# EAGLE board colorTemp (EAGLE 9.6.1)
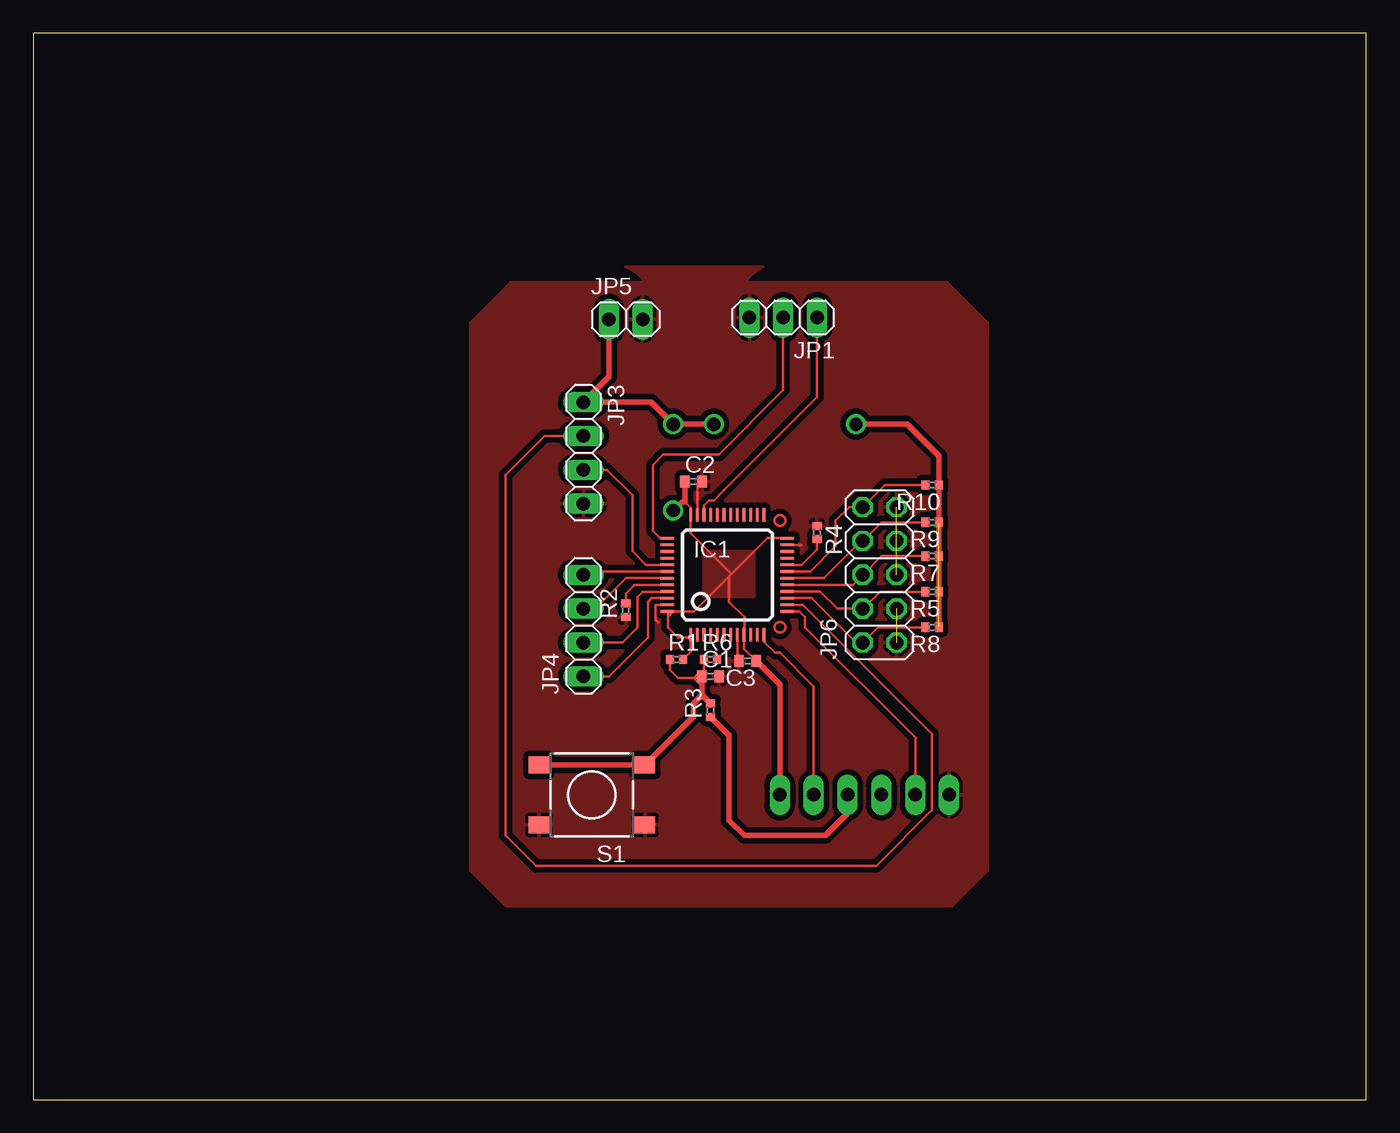
[diagram p0: board, top side]
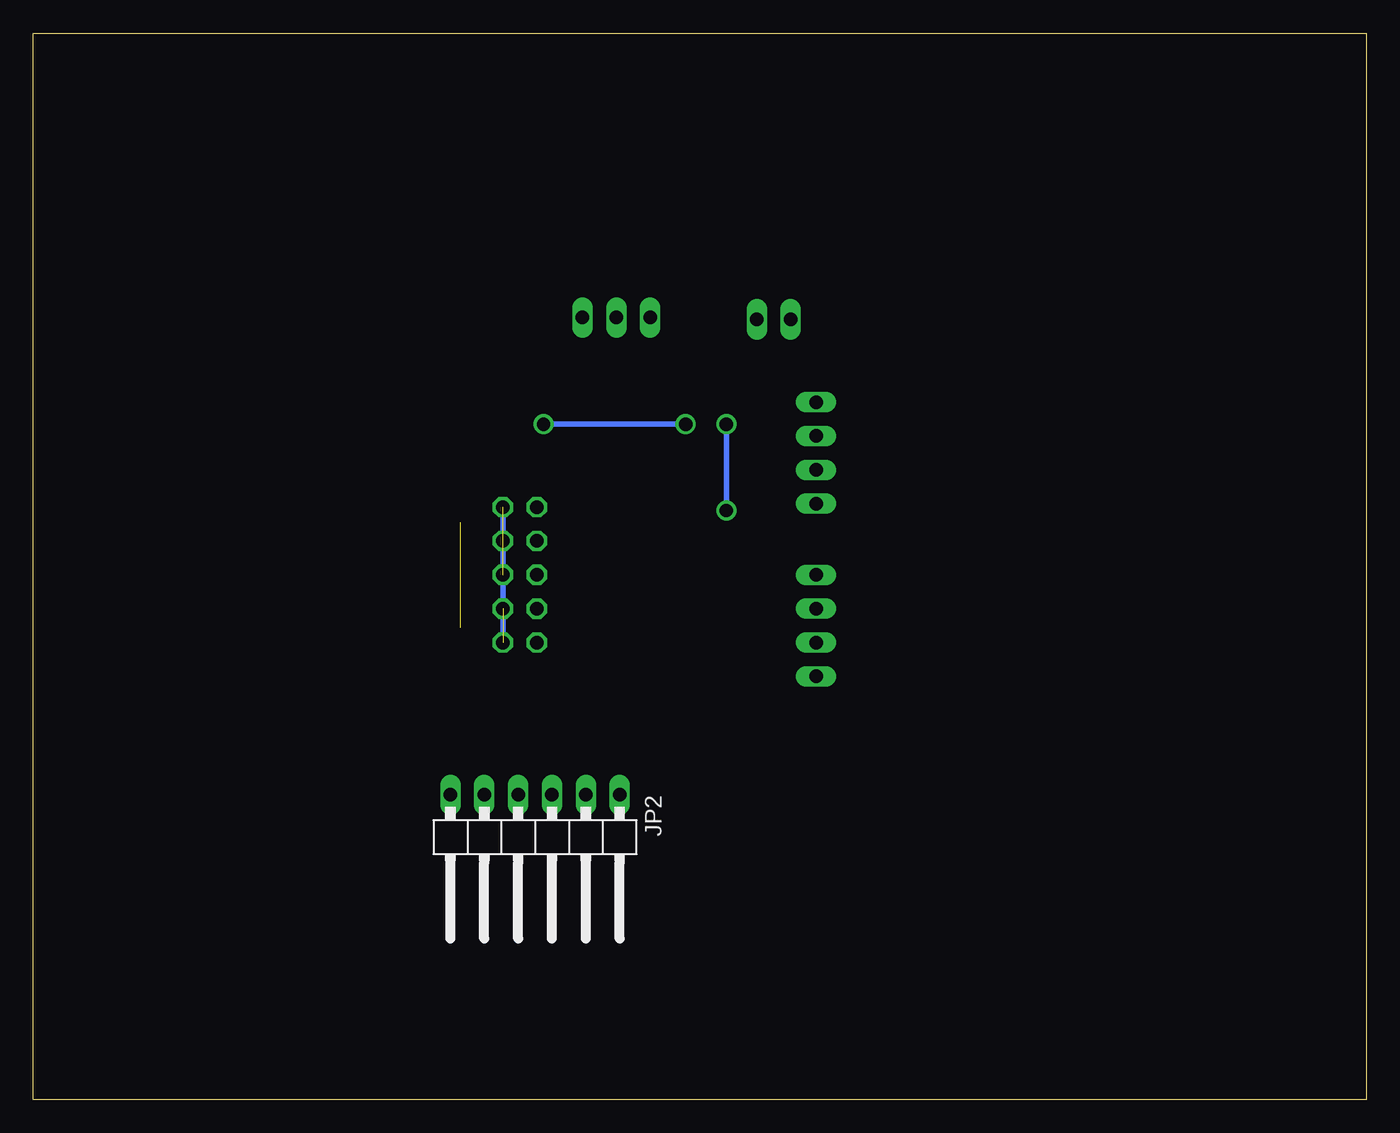
[diagram p1: board, bottom side, seen from below]

Size 100 x 80 mm. Coordinates in mm from the lower left corner, seen from the top.
Outline: 0,0 100,0 100,80 0,80 0,0
Copper layers (1*16): Top 0.035mm / dielectric 1.5mm / Bottom 0.035mm
Design rules "default": minimum track width 6mil, minimum drill 0.35mm, track to track 6mil, track to pad 6mil, pad to pad 6mil, via to via 6mil, smd to smd 6mil, copper to edge 40mil, drill to drill 6mil, minimum pad ring 10mil, minimum via ring 8mil, stop-mask expansion 4mil, vias tented up to drill 0mil, thermal gap 10mil

## Footprints (pad centres in the part's own frame; a part is rotated, then mirrored left to right if it is on the bottom)
C0402 = smd 0.7 x 0.9: 1 -0.65,0; 2 0.65,0
TQFP48 = smd 0.2 x 1: 1 -2.75,-4.5; 2 -2.25,-4.5; 3 -1.75,-4.5; 4 -1.25,-4.5; 5 -0.75,-4.5; 6 -0.25,-4.5; 7 0.25,-4.5; 8 0.75,-4.5; 9 1.25,-4.5; 10 1.75,-4.5; 11 2.25,-4.5; 12 2.75,-4.5; 25 2.75,4.5; 26 2.25,4.5; 27 1.75,4.5; 28 1.25,4.5; 29 0.75,4.5; 30 0.25,4.5; 31 -0.25,4.5; 32 -0.75,4.5; 33 -1.25,4.5; 34 -1.75,4.5; 35 -2.25,4.5; 36 -2.75,4.5 | smd 1 x 0.2: 13 4.5,-2.75; 14 4.5,-2.25; 15 4.5,-1.75; 16 4.5,-1.25; 17 4.5,-0.75; 18 4.5,-0.25; 19 4.5,0.25; 20 4.5,0.75; 21 4.5,1.25; 22 4.5,1.75; 23 4.5,2.25; 24 4.5,2.75; 37 -4.5,2.75; 38 -4.5,2.25; 39 -4.5,1.75; 40 -4.5,1.25; 41 -4.5,0.75; 42 -4.5,0.25; 43 -4.5,-0.25; 44 -4.5,-0.75; 45 -4.5,-1.25; 46 -4.5,-1.75; 47 -4.5,-2.25; 48 -4.5,-2.75
1X03 = drill 1.016 long: 1 -2.54,0; 2 0,0; 3 2.54,0
1X06/90 = drill 1.016 long: 1 -6.35,-3.81; 2 -3.81,-3.81; 3 -1.27,-3.81; 4 1.27,-3.81; 5 3.81,-3.81; 6 6.35,-3.81
1X04 = drill 1.016 long: 1 -3.81,0; 2 -1.27,0; 3 1.27,0; 4 3.81,0
1X02 = drill 1.016 long: 1 -1.27,0; 2 1.27,0
2X05 = drill 1.016 octagon: 1 -5.08,-1.27; 2 -5.08,1.27; 3 -2.54,-1.27; 4 -2.54,1.27; 5 0,-1.27; 6 0,1.27; 7 2.54,-1.27; 8 2.54,1.27; 9 5.08,-1.27; 10 5.08,1.27
R0402 = smd 0.6 x 0.7: 1 -0.5,0; 2 0.5,0
DTSM-6 = smd 1.55 x 1.3: 1 -3.975,2.25; 2 3.975,2.25; 3 -3.975,-2.25; 4 3.975,-2.25

## Placement (x,y rotation side)
C1  1nF  [C0402]  50.8,31.75 0 top
C2  100n  [C0402]  49.53,46.35 0 top
C3  100n  [C0402]  53.59,32.89 180 top
IC1  STM32F10XCXT6  [TQFP48]  52.07,39.37 0 top
JP1  [1X03]  56.26,58.67 180 top
JP2  [1X06/90]  62.36,19.05 180 bottom
JP3  [1X04]  41.27,48.51 270 top
JP4  [1X04]  41.27,35.56 90 top
JP5  [1X02]  44.45,58.55 0 top
JP6  [2X05]  63.5,39.37 90 top
R1  4.7k  [R0402]  48.26,33.02 0 top
R2  1k  [R0402]  44.45,36.7 90 top
R3  0Ohm  [R0402]  50.8,29.21 90 top
R4  1k  [R0402]  58.8,42.55 270 top
R5  [R0402]  67.44,38.1 180 top
R6  10k  [R0402]  50.8,33.02 0 top
R7  [R0402]  67.44,40.77 180 top
R8  [R0402]  67.44,35.43 180 top
R9  [R0402]  67.44,43.31 180 top
R10  [R0402]  67.44,46.1 180 top
S1  DTSM-6  [DTSM-6]  41.91,22.86 180 top

## Library data of the parts
C1-C3 = rcl; SPICEPREFIX: C
IC1 = stm32
JP1-JP6 = pinhead
R1-R10 = rcl; SPICEPREFIX: R
S1 = switch-tact

## Nets
3V3: C2.1 C3.1 IC1.1 IC1.9 IC1.24 IC1.36 IC1.48 JP2.1 JP3.1 JP5.1 R1.2 R5.1 R7.1 R8.1 R9.1 R10.1
ADC1: IC1.15 JP6.2 R8.2
ADC2: IC1.16 JP6.4 R5.2
ADC3: IC1.17 JP6.6 R7.2
ADC4: IC1.18 JP6.8 R9.2
ADC5: IC1.19 JP6.10 R10.2
GND: C1.2 C2.2 C3.2 IC1.8 IC1.23 IC1.35 IC1.47 JP1.3 JP2.6 JP3.4 JP5.2 JP6.1 JP6.3 JP6.5 JP6.7 JP6.9 R2.1 R4.1 S1.1 S1.2
N$2: IC1.44 R2.2
N$9: IC1.20 R4.2
N$18: IC1.7 R6.2
N$20: C1.1 R1.1 R3.2 R6.1 S1.3 S1.4
OE: IC1.41 JP3.3
OUT: IC1.14 JP3.2
RESET: JP2.3 R3.1
RX: IC1.13 JP2.5
S0: IC1.42 JP4.4
S1: IC1.43 JP4.3
S2: IC1.45 JP4.2
S3: IC1.46 JP4.1
SWCLK: IC1.37 JP1.2
SWDIO: IC1.34 JP1.1
TX: IC1.12 JP2.2

## Tracks (layer width: path | path; a pad name or v marks a point on that pad's centre or on a via)
3V3  (via drill 1)  (3 unrouted)
  Top 0.203: 49.32,34.67 IC1.1 49.32,34.84 49.15,34.67 | 49.32,34.67 49.32,34.5 | 49.32,34.5 49.32,33.58 R1.2 | C3.1 53.32,33.82 IC1.9 53.34,34.89 53.34,36.2 52.2,37.34 52.2,39.24 | 48.88,44.85 49.32,44.41 IC1.36 49.32,42.5 52.39,39.43 | 47.62,36.2 47.62,35.43 48.39,34.67 49.15,34.67 | 49.15,34.67 49.32,34.67 | 49.15,34.67 49.32,34.5 | IC1.24 55.07,42.12 52.39,39.43 | 52.39,39.43 52.2,39.24 | IC1.48 48.01,36.62 | 48.01,36.62 49.57,36.62 52.2,39.24 | 47.62,36.2 47.82,36.39 | 47.82,36.39 48.01,36.58 48.01,36.62 | IC1.48 47.8,36.39 47.82,36.39 | IC1.48 47.62,36.56 47.62,36.2
  Top 0.406: C3.1 56.01,31.13 JP2.1 | JP5.1 43.18,54.23 JP3.1 46.35,52.32 v48.01,50.67 v51.05,50.67 | v48.01,44.2 48.66,44.85 48.88,44.85 C2.1 | v61.72,50.67 65.53,50.67 67.94,48.27 R10.1 R8.1
  Bottom 0.406: v48.01,44.2 v48.01,50.67 | v51.05,50.67 v61.72,50.67
  pour Top: 50.29,41.15 50.29,37.72 54.1,37.72 54.1,41.15
ADC1
  Top 0.203: IC1.15 58.39,37.62 61.72,34.29 JP6.2 63.37,35.43 R8.2
ADC2
  Top 0.203: IC1.16 59.03,38.12 60.33,36.83 JP6.4 63.5,38.1 R5.2
ADC3
  Top 0.203: IC1.17 61.48,38.62 JP6.6 63.63,40.77 R7.2
ADC4
  Top 0.203: IC1.18 59.31,39.12 62.1,41.91 JP6.8 63.63,43.31 R9.2
ADC5
  Top 0.203: IC1.19 58.29,39.62 60.2,41.53 60.2,43.43 61.21,44.45 JP6.10 63.88,46.1 R10.2
GND  (3 unrouted)
  Top 0.203: IC1.35 49.82,45.99 C2.2 | IC1.8 52.82,33.02 C3.2 | IC1.47 46.68,37.12 46.68,35.99 46.86,35.81 | IC1.23 57.58,41.62 57.6,41.6
  Bottom 0.406: JP6.9 JP6.1
  pour Top (isolate 2.54): 30.86,62.48 72.01,62.48 72.01,14.48 30.86,14.48
  pour Top (isolate 0.406): 35.81,61.34 68.58,61.34 71.63,58.29 71.63,17.14 68.96,14.48 35.43,14.48 32.77,17.14 32.77,58.29
N$2
  Top 0.203: IC1.44 45.1,38.62 44.45,37.97 R2.2
N$9
  Top 0.203: IC1.20 57.65,40.12 58.8,41.27 R4.2
N$18
  Top 0.203: IC1.7 52.32,34.03 R6.2
N$20
  Top 0.203: R6.1 50.3,32 | 50.3,32 50.3,31.9 C1.1 | 50.15,31.24 50.15,31.62 | 50.15,31.62 C1.1 | 49.91,30.1 50.29,30.1 50.35,30.16 | R1.1 47.76,32.25 48.39,31.62 49.53,31.62 | 49.53,31.62 50.02,31.62 | 50.02,31.62 50.15,31.62 | C1.1 50.02,31.62 | 49.53,31.62 49.91,32 50.3,32 | 49.53,31.62 50.15,31 50.15,30.86
  Top 0.406: S1.4 S1.3 49.53,28.75 49.53,29.72 49.91,30.1 50.15,30.34 50.15,30.86 50.15,31.24 | R3.2 50.35,30.16 50.15,30.36
OE
  Top 0.203: JP3.3 43.05,47.24 44.96,45.34 44.96,41.15 45.99,40.12 IC1.41
OUT
  Top 0.203: IC1.14 57.75,37.12 67.44,27.43 67.44,21.72 63.25,17.53 37.72,17.53 35.43,19.81 35.43,46.86 38.35,49.78 JP3.2
RESET
  Top 0.406: R3.1 52.2,27.31 52.2,20.95 53.34,19.81 59.44,19.81 61.09,21.46 JP2.3
RX
  Top 0.203: IC1.13 57.49,36.62 57.91,36.2 57.91,35.43 66.17,27.18 JP2.5
S0
  Top 0.203: IC1.42 41.52,39.62 JP4.4
S1
  Top 0.203: IC1.43 44.45,39.12 42.16,36.83 JP4.3
S2
  Top 0.203: IC1.45 47.55,38.1 45.72,38.1 45.34,37.72 45.34,35.43 44.2,34.29 JP4.2
S3
  Top 0.203: IC1.46 46.38,37.62 46.1,37.34 46.1,34.67 43.18,31.75 JP4.1
SWCLK
  Top 0.203: JP1.2 56.26,53.21 51.44,48.39 47.24,48.39 46.48,47.62 46.48,42.67 47.03,42.12 IC1.37
SWDIO
  Top 0.203: JP1.1 58.8,52.7 51.82,45.72 51.05,44.96 50.7,44.96 50.32,44.57 IC1.34
TX
  Top 0.203: JP2.2 58.55,30.99 56.01,33.53 55.63,33.53 54.86,34.29 54.86,34.83 IC1.12
(copper drawn outside any net)
  shapes: Top circle x2